# Altium PCB UZ_D_ENDAT.PcbDoc (part 1 of 2)
Units mm, origin at the board's own origin, x right, y up, seen from the top; angles counter-clockwise.
Board outline 155.99 x 100.01 mm, 4 copper layers (Top Layer, GND, VCC, Bottom Layer), stack 0.98 mm thick; 164 components, 121 nets, 547 pads, 92 vias.
Unrouted connection lines stored in the file: 157.
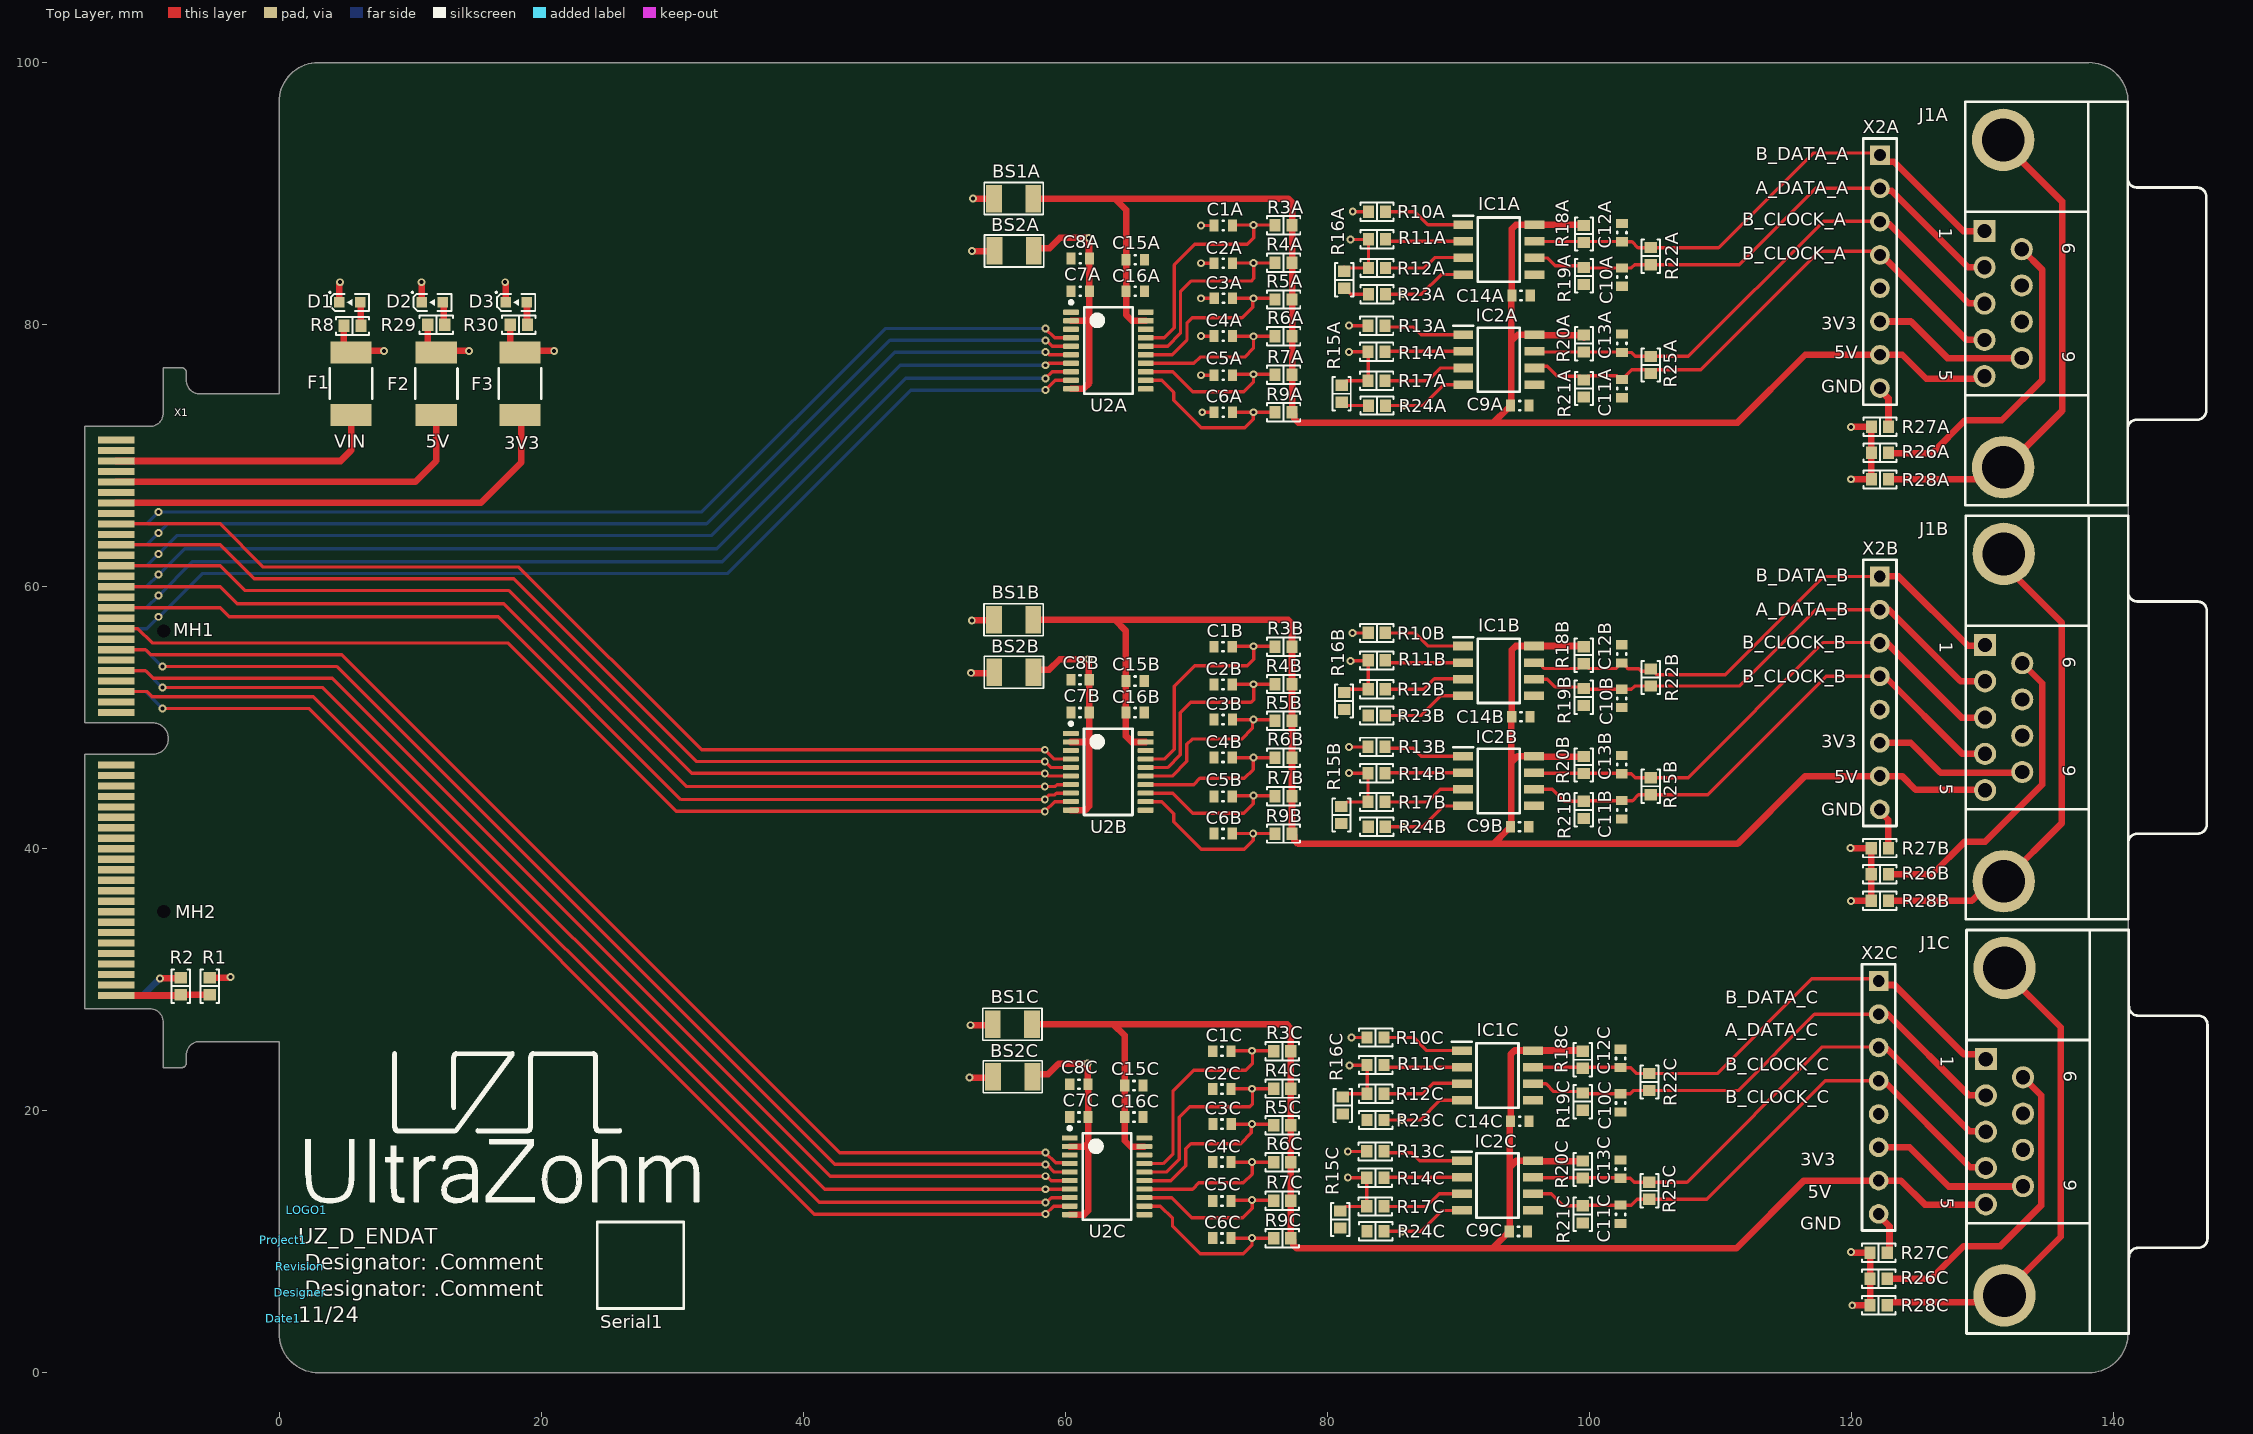
[diagram p0: Top Layer view]
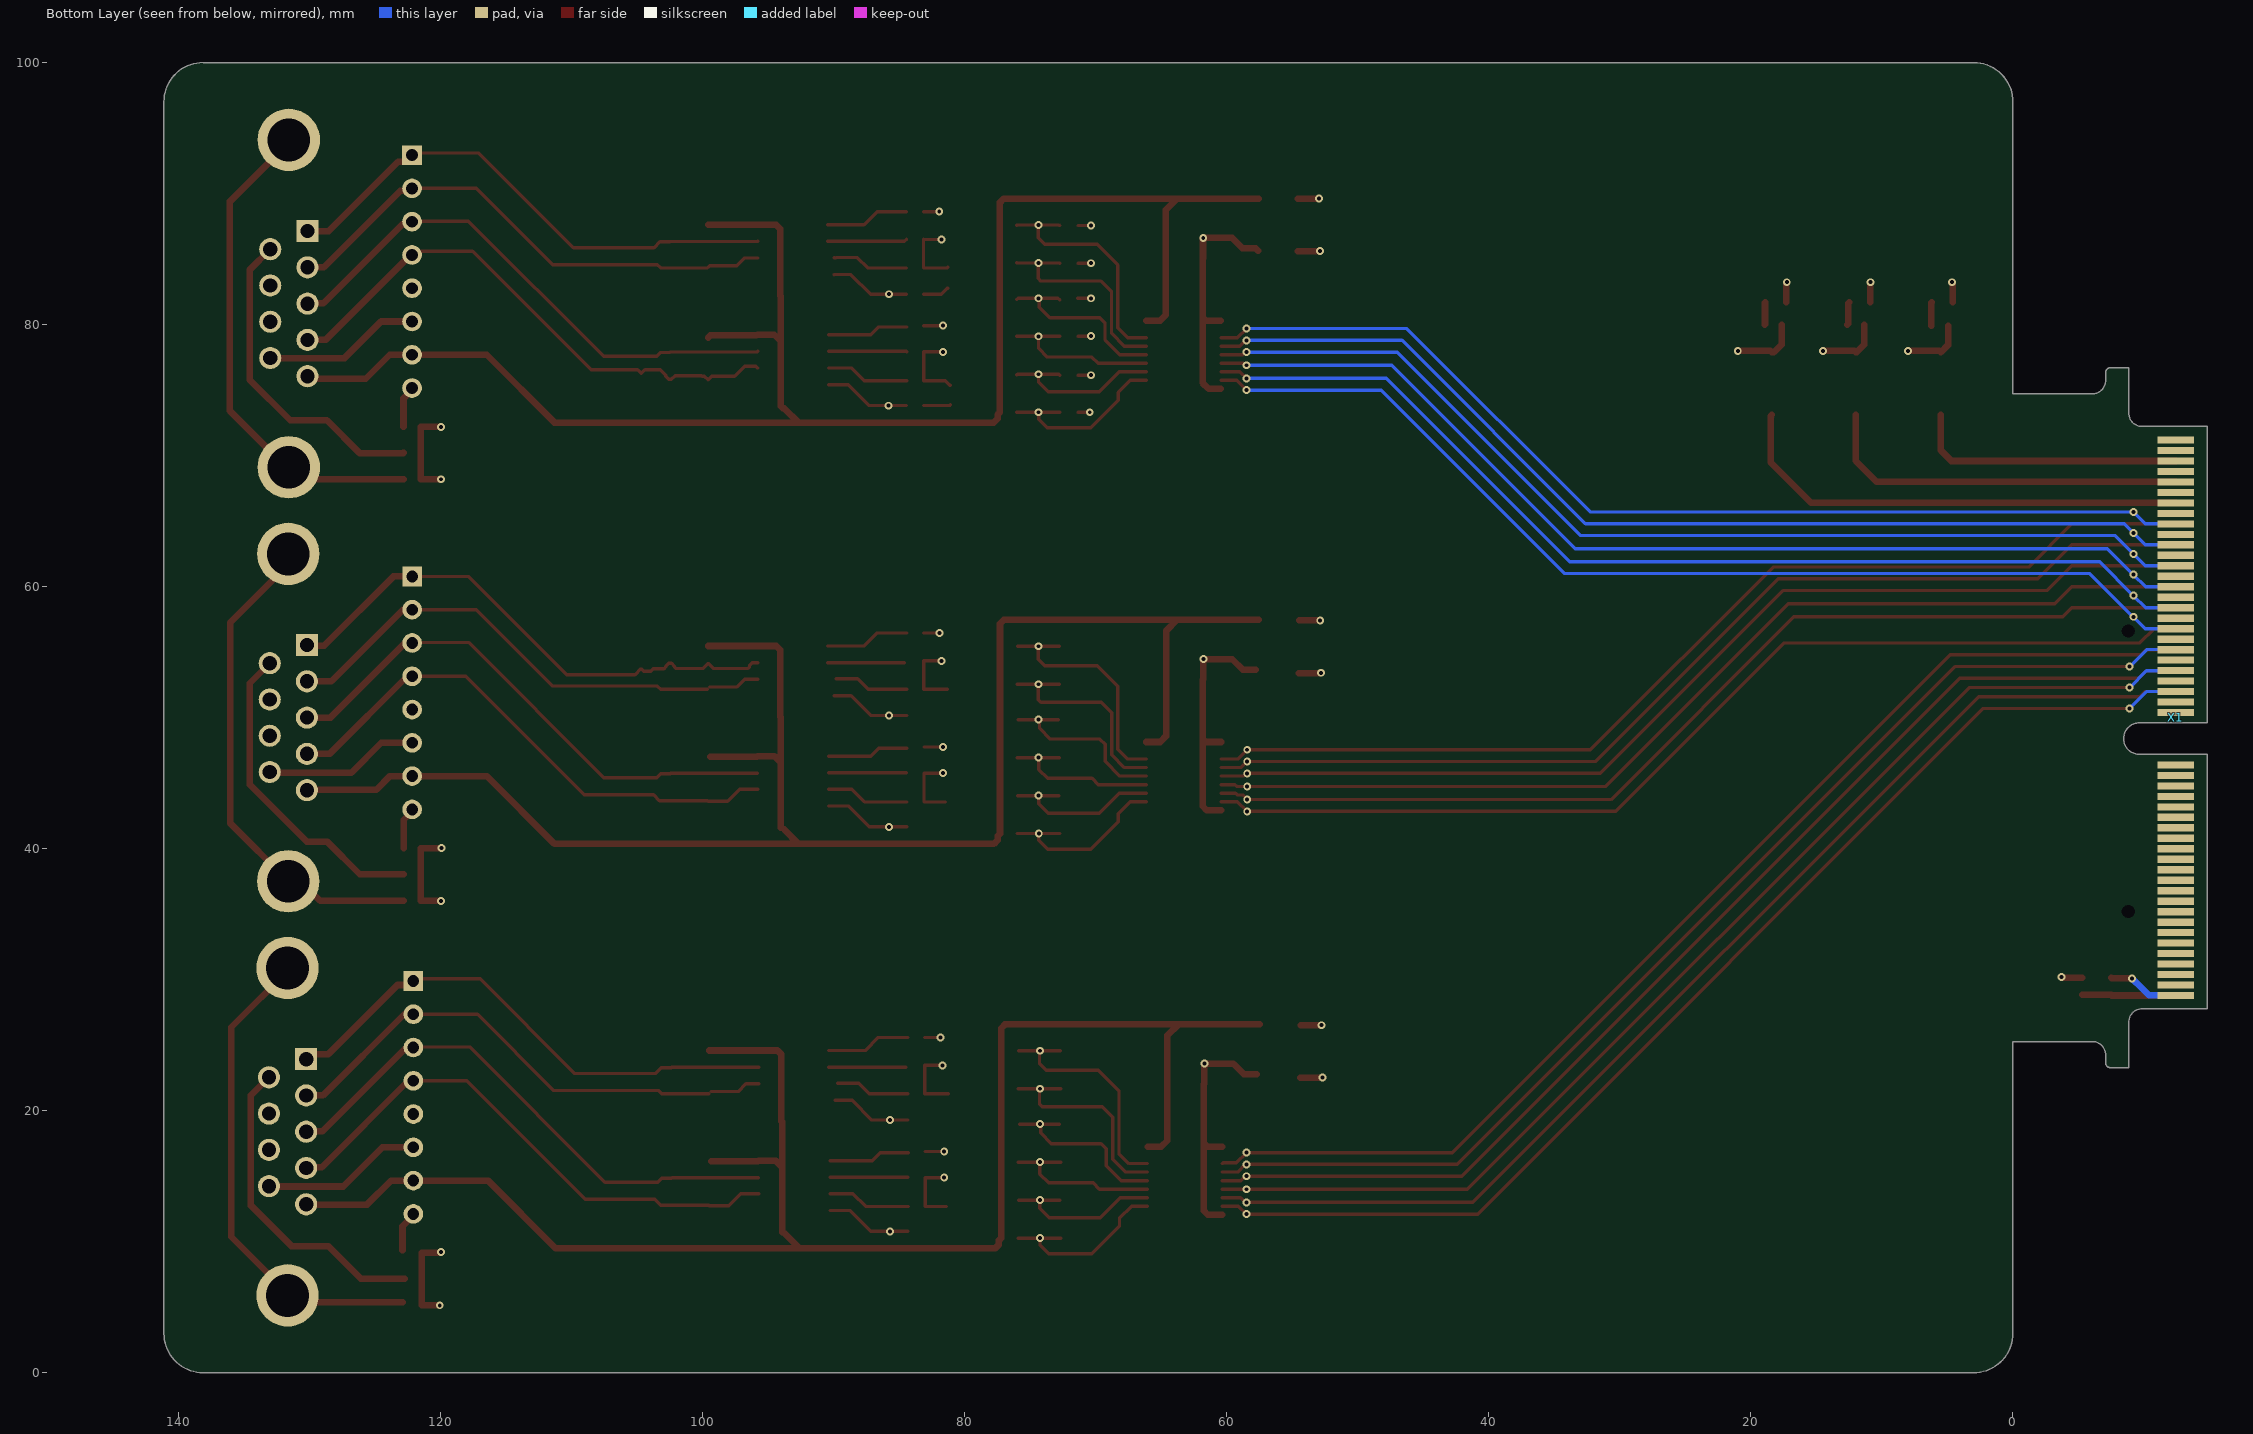
[diagram p1: Bottom Layer view, seen from below]
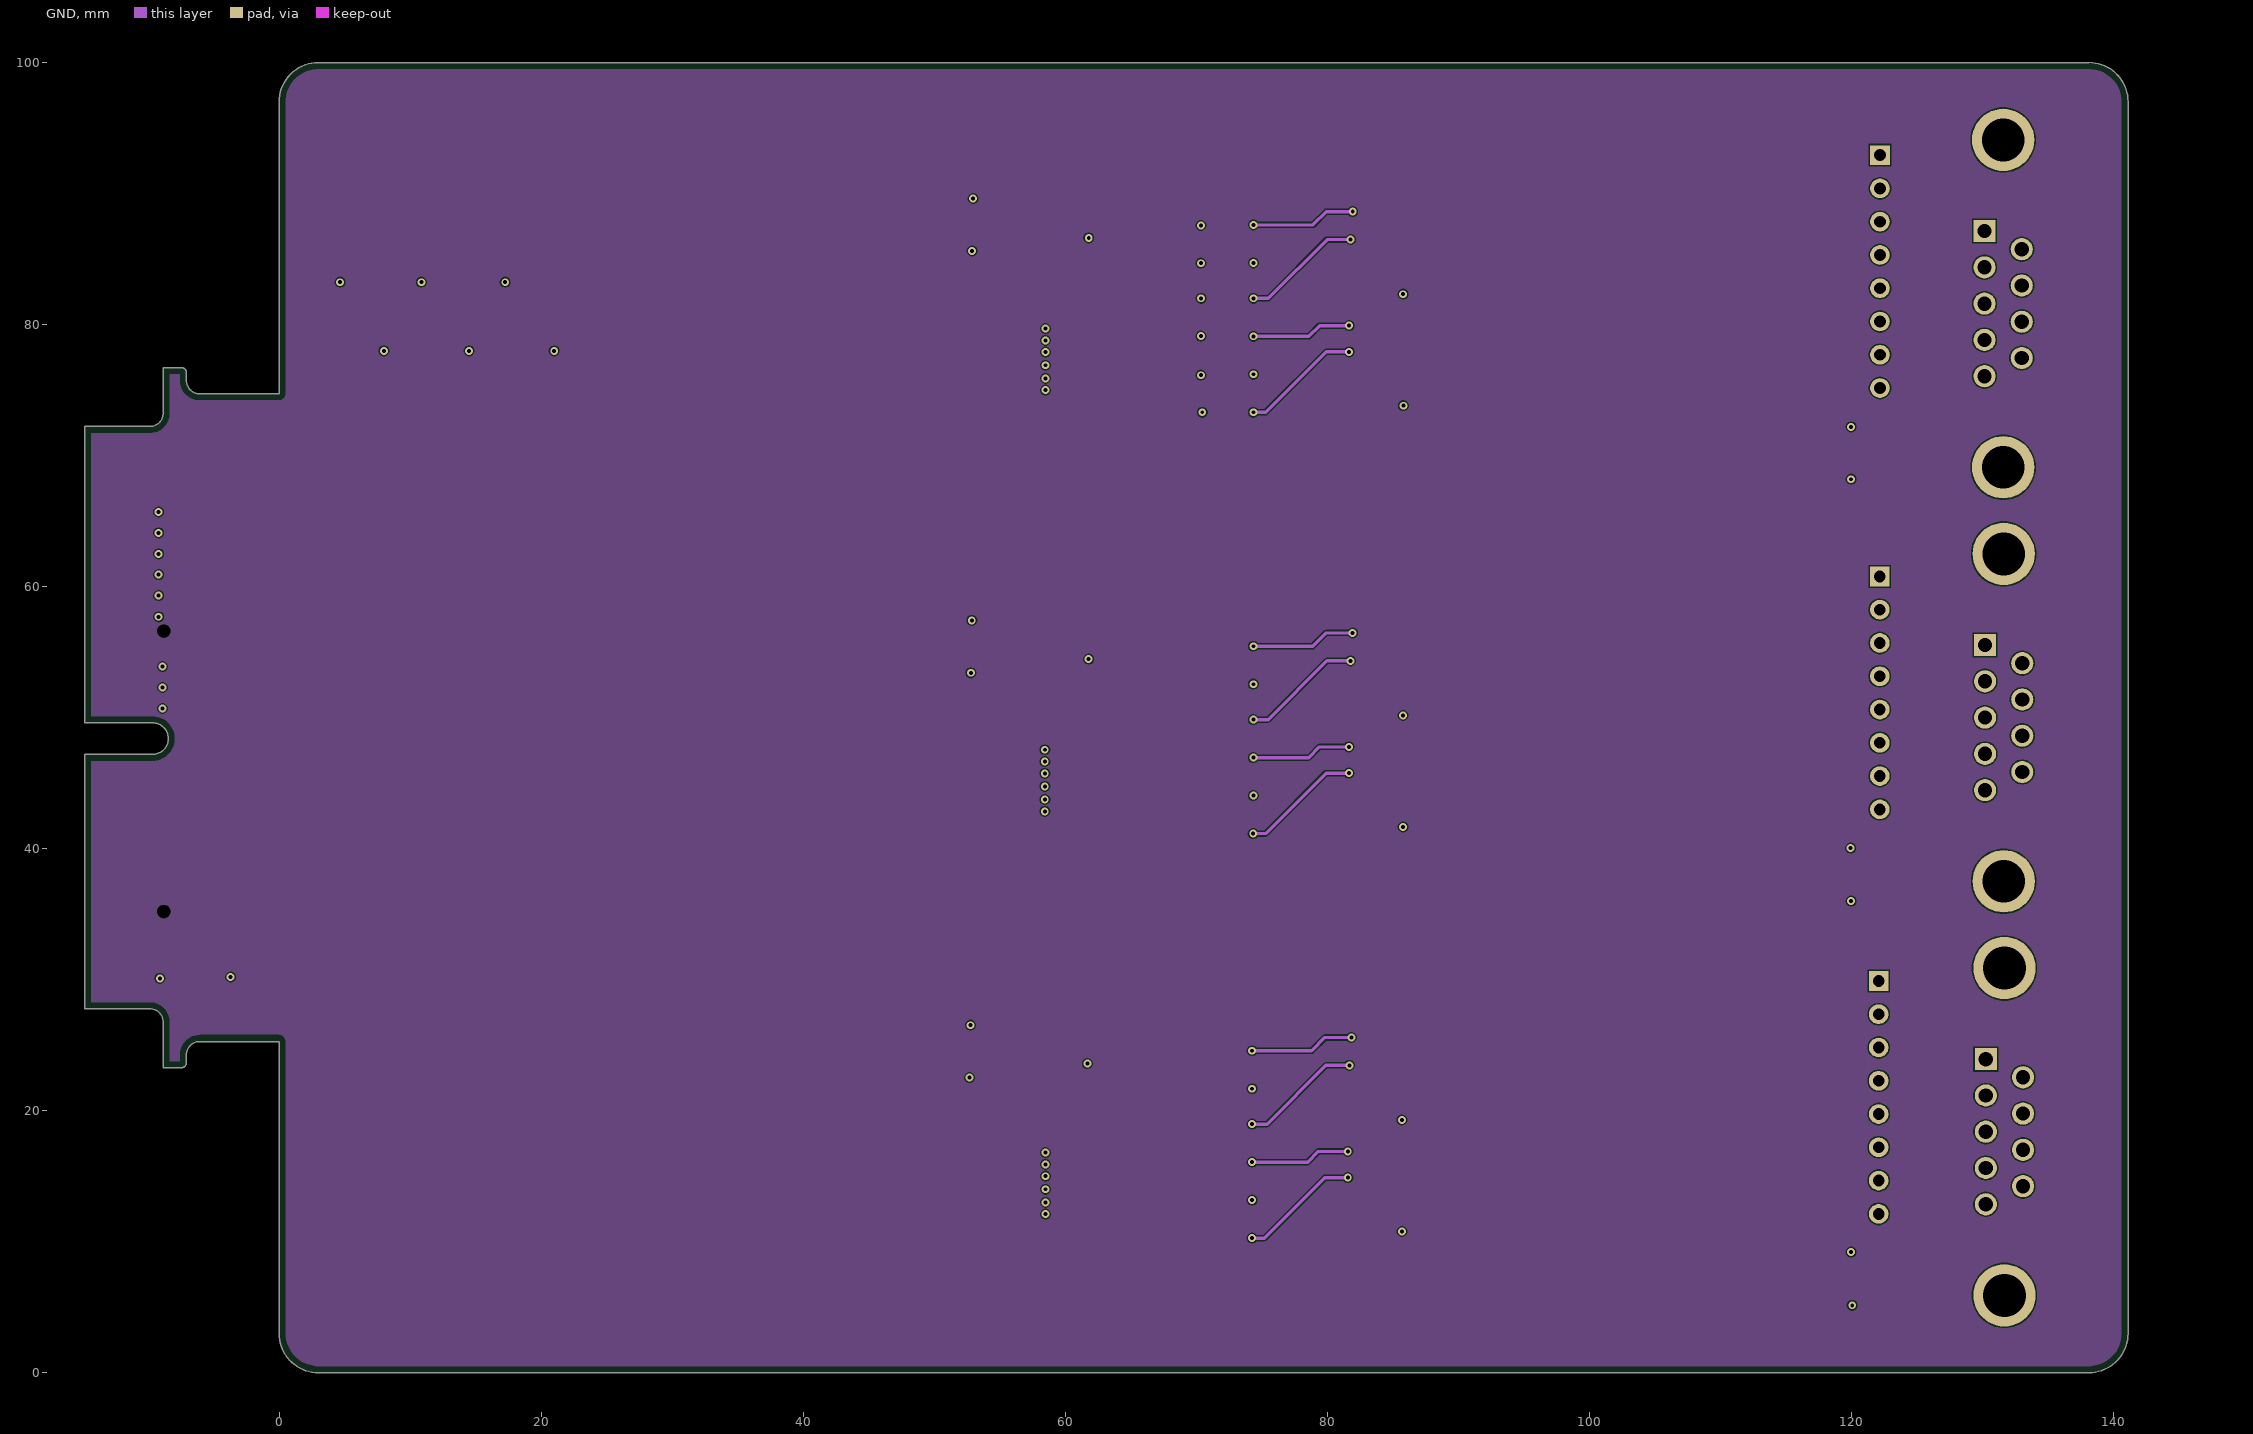
[diagram p2: GND]
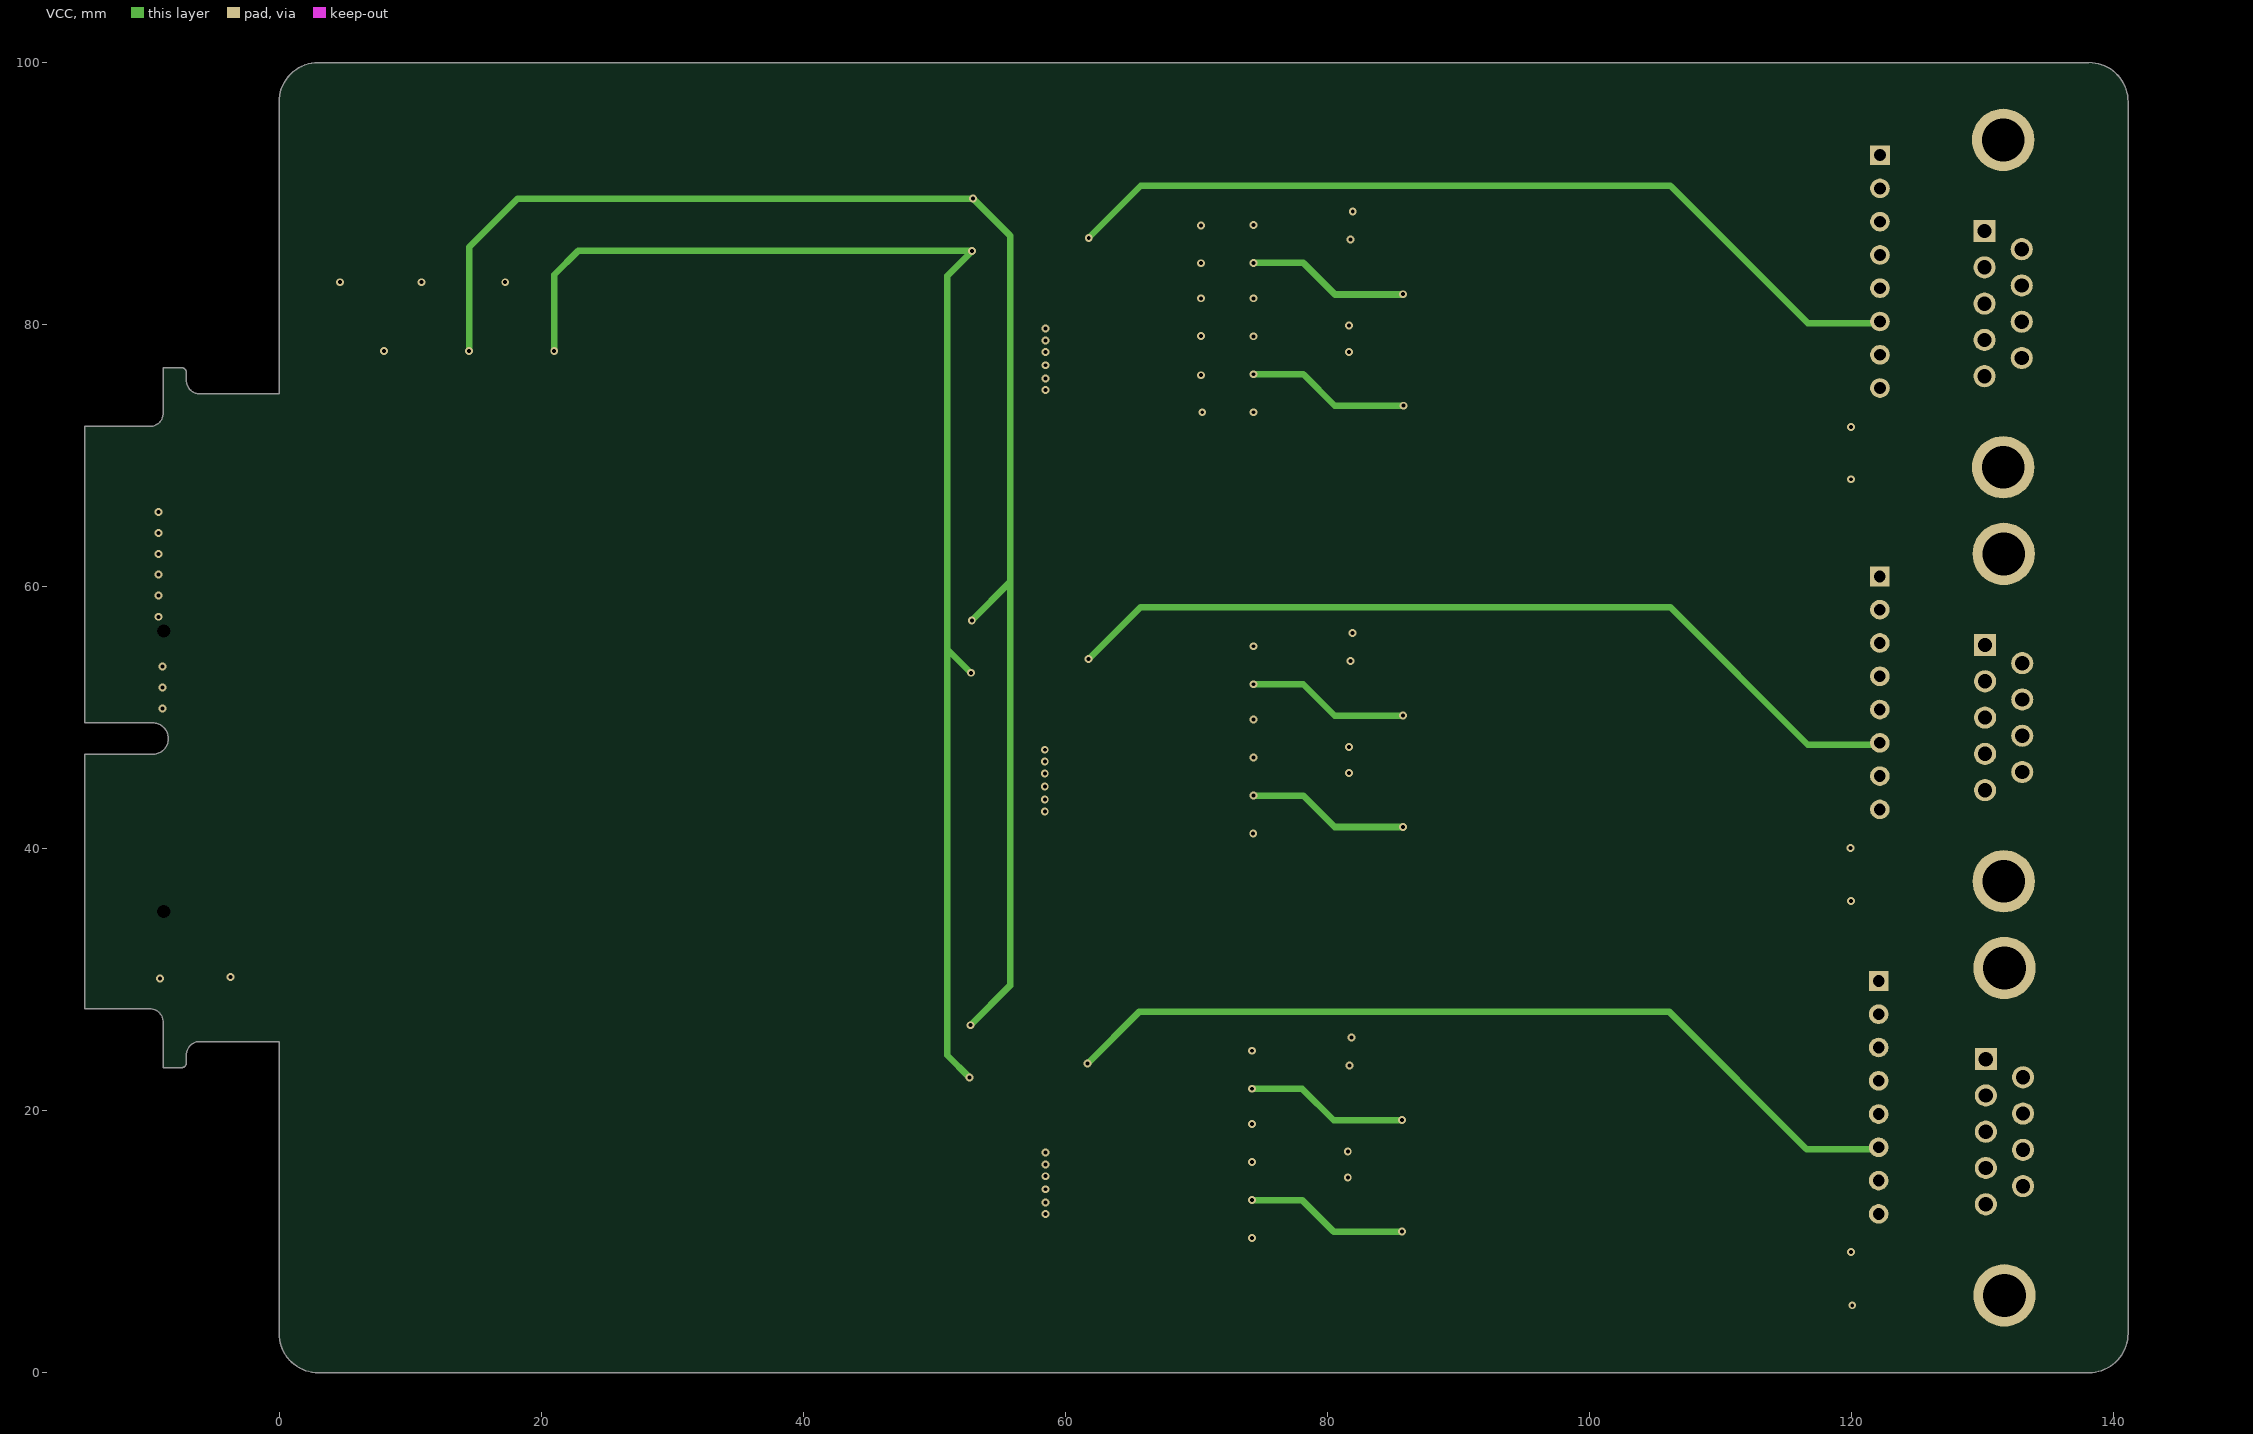
[diagram p3: VCC]
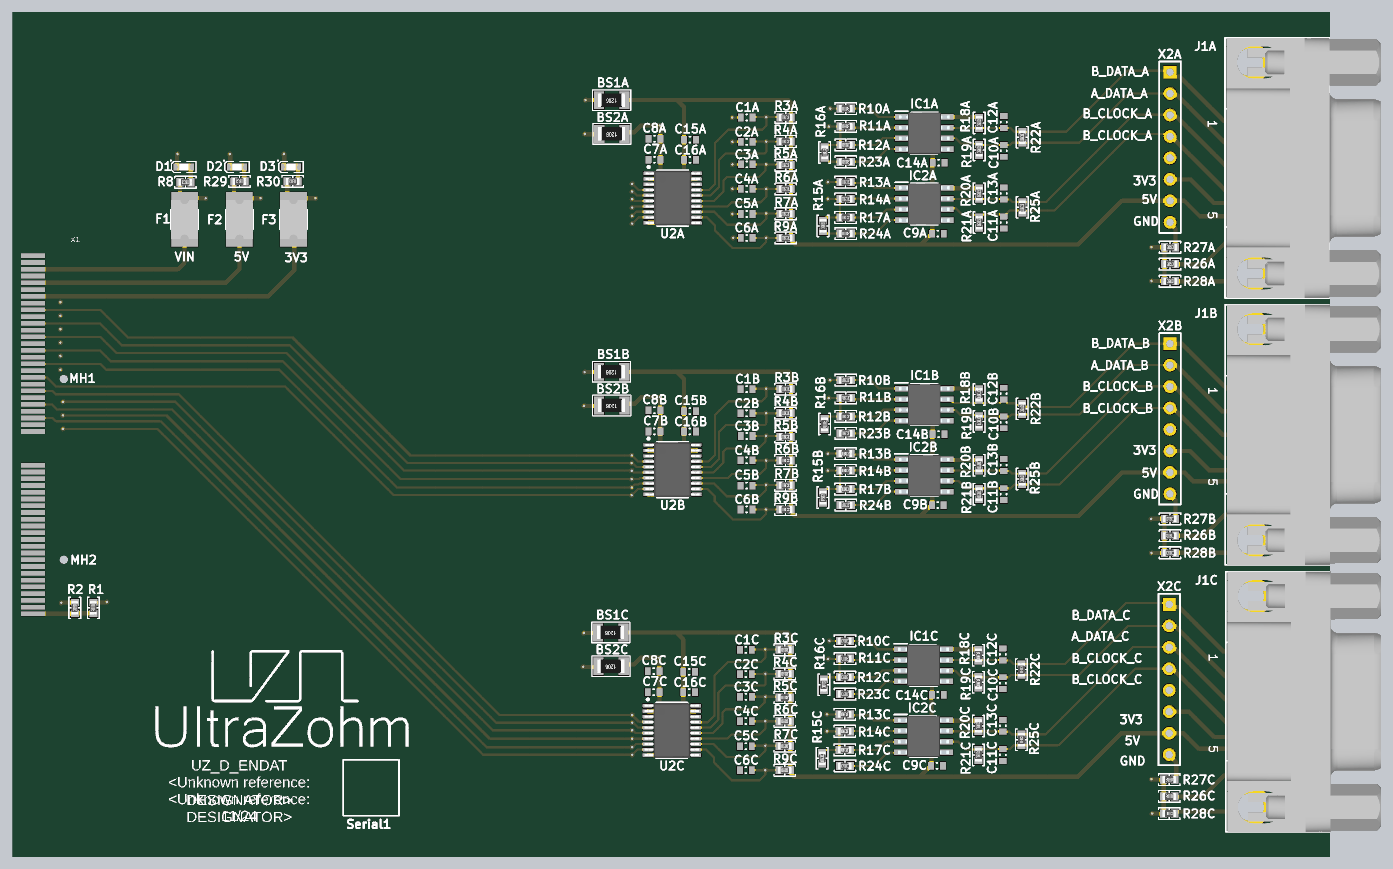
[diagram p5: 3D render of the assembled board from above, using the file's embedded part models]

## Layer stack, top to bottom
Top Solder: solder mask 0.01, Solder Resist, Dk 3.5
Top Layer: signal copper 0.035
Dielectric 2: prepreg 0.115, FR-4, Dk 4.4
Dielectric 4: prepreg 0.115, FR-4, Dk 4.4
GND: signal copper 0.035
Dielectric 1: core 0.38, Core-036, Dk 4.4
VCC: signal copper 0.035
Dielectric 5: prepreg 0.115, FR-4, Dk 4.4
Dielectric 3: prepreg 0.115, FR-4, Dk 4.4
Bottom Layer: signal copper 0.035
Bottom Solder: solder mask 0.01, Solder Resist, Dk 3.5

## Board outline
-14.853,27.775 -9.853,27.775 cw(c-9.853,26.775) -8.853,26.775 -8.853,23.275 -7.473,23.275 ccw(c-7.473,23.675) -7.073,23.675 -7.073,24.275 cw(c-6.073,24.275) -6.073,25.275 0,25.275 0,3 ccw(c3,3) 3,0 138.141,0 ccw(c138.141,3) 141.141,3 141.141,97 141.141,97.01 ccw(c138.141,97.01) 138.141,100.01 3,100 ccw(c3,97) 0,97 0,74.725 -6.073,74.725 cw(c-6.073,75.725) -7.073,75.725 -7.073,76.325 ccw(c-7.473,76.325) -7.473,76.725 -8.853,76.725 -8.853,73.225 cw(c-9.853,73.225) -9.853,72.225 -14.853,72.225 -14.853,49.6 -9.653,49.6 cw(c-9.653,48.4) -9.653,47.2 -14.853,47.2

## Design rules (kind name [scope] priority, off if disabled: settings)
AssemblyTestPointUsage [InNetClass('3V3_SingleEnded') or InNetClass('5V_SingleEnded') or InNetClass('15V_SingleEnded') or InNetClass('DifferentialSignals')] p1:
BoardOutlineClearance [All] p1: gap=0.5 ignorepadtopadclearanceinfootprint=FALSE except(0: Arc-SplitContinuation Track-SplitContinuation SMDPad-SplitContinuation THPad-SplitContinuation Via-SplitContinuation Fill-SplitContinuation Poly-SplitContinuation Region-SplitContinuation Text-SplitContinuation)
Clearance Clearance_Differential [InNetClass('DifferentialSignals')] p1: gap=0.1 ignorepadtopadclearanceinfootprint=TRUE except(0: Arc-Hole Track-Hole SMDPad-Hole THPad-Hole Via-Hole Fill-Hole Poly-Hole Region-Hole Text-Hole; 0.3: SMDPad-Via; 0.4: THPad-Via)
Clearance Clearance_Power [InNetClass('Power')] p2: gap=0.1 ignorepadtopadclearanceinfootprint=TRUE except(0: Arc-Hole Track-Hole SMDPad-Hole THPad-Hole Via-Hole Fill-Hole Poly-Hole Region-Hole Text-Hole; 0.15: Via-Poly; 0.2: Track-Poly; 0.25: THPad-Poly; 0.3: Fill-Poly Poly-Region; 0.5: Poly-Poly)
Clearance [All] p3: gap=0.1 ignorepadtopadclearanceinfootprint=TRUE except(0: Arc-Hole Track-Hole SMDPad-Hole THPad-Hole Via-Hole Fill-Hole Poly-Hole Region-Hole Text-Hole; 0.4: SMDPad-Via THPad-Via; 0.5: Poly-Poly)
ComponentClearance [All] p1: gap=0.1 collisioncheckmode=3 verticalgap=0.1 showdistances=FALSE
DiffPairsRouting [InNetClass('DifferentialSignals')] p1: maxlimit=0.25 minlimit=0.127 mostfreqgap=0.241 toplayer_maxgap=0.127 toplayer_prefgap=0.127 toplayer_minwidth=0.285 toplayer_maxwidth=0.285 toplayer_prefwidth=0.293 midlayer1_minwidth=0.069 midlayer1_maxwidth=0.15 midlayer1_prefwidth=0.15 midlayer2_mingap=0.165 midlayer2_minwidth=0.1 midlayer2_maxwidth=0.15 midlayer2_prefwidth=0.15 bottomlayer_maxgap=0.127 bottomlayer_prefgap=0.127 bottomlayer_minwidth=0.285 bottomlayer_maxwidth=0.285 bottomlayer_prefwidth=0.293 impedanceprofiledriven=TRUE impedanceprofileid={5F7DE71B-7B0B-4CDE-8AE7-8AD61221F3A5} impedanceprofilevalue=100.000000 maxuncoupledlength=12.7
FanoutControl Fanout_Power [InNetClass('Power') or InNet('ENABLE')] p1: bgadir=Out bgaviamode=Centered fanoutstyle=Auto fanoutdirection=None viagrid=0.025
FanoutControl Fanout_RS422 [InNetClass('DifferentialSignals')] p2: bgadir=Out bgaviamode=Closest fanoutstyle=Rows fanoutdirection=OutOnly viagrid=0.025
FanoutControl Fanout_BGA [IsBGA] p3 off: bgadir=Out bgaviamode=Centered fanoutstyle=Auto fanoutdirection=Alternating viagrid=0.025 // Fanout_BGA (Default Rule)
FanoutControl Fanout_LCC [IsLCC] p4 off: bgadir=Out bgaviamode=Centered fanoutstyle=Auto fanoutdirection=Alternating viagrid=0.025 // Fanout_LCC (Default Rule)
FanoutControl Fanout_SOIC [IsSOIC] p5 off: bgadir=Out bgaviamode=Centered fanoutstyle=Auto fanoutdirection=Alternating viagrid=0.025 // Fanout_SOIC (Default Rule)
FanoutControl Fanout_Small [(CompPinCount < 5)] p6 off: bgadir=Out bgaviamode=Centered fanoutstyle=Auto fanoutdirection=OutThenIn viagrid=0.025 // Fanout_Small (Default Rule)
FanoutControl Fanout_Default [All] p7: bgadir=NE bgaviamode=Closest fanoutstyle=Rows fanoutdirection=InOnly viagrid=0.025 // Fanout_Default (Default Rule)
Height [All] p1: minheight=0 maxheight=50 prefheight=12.7
HoleSize [All] p1: absolutevalues=TRUE maxlimit=4 minlimit=0.025 maxpercent=80.000 minpercent=20.000
PolygonConnect PolygonConnect_Therm [HoleSize > 2.6] p1: connectstyle=Direct reliefconductorwidth=0.254 reliefentries=4 polygonreliefangle="90 Angle" airgapwidth=0.254
PolygonConnect PolygonConnect_via [InPadClass('pad') or IsVia] p2: connectstyle=Direct reliefconductorwidth=0.254 reliefentries=4 polygonreliefangle="90 Angle" airgapwidth=0.254
PolygonConnect [All] p3: connectstyle=Relief reliefconductorwidth=0.3 reliefentries=4 polygonreliefangle="90 Angle" airgapwidth=0.25
RoomDefinition Component_LowerEdgeKeepOut [All] p1: confinementstyle=ConfineOut formatcopy=TRUE lockcomponents=FALSE outline 0,0 142,0 142,3 0,3
RoomDefinition Component_UpperEdgeKeepOut [All] p2: confinementstyle=ConfineOut formatcopy=TRUE lockcomponents=FALSE outline 0,97 142,97 142,100 0,100
RoutingLayers RoutingLayers_3V3Signals [InNetClass('3V3_SingleEnded')] p1 off: top layer_v5=TRUE mid layer 1_v5=TRUE mid layer 2_v5=TRUE bottom layer_v5=TRUE
RoutingLayers RoutingLayers_SingleEnded [InNetClass('15V_SingleEnded') or InNetClass('3V3_SingleEnded') or InNetClass('5V_SingleEnded')] p2 off: top layer_v5=TRUE mid layer 1_v5=TRUE mid layer 2_v5=TRUE bottom layer_v5=TRUE
RoutingLayers RoutingLayers_Differential [InNetClass('DifferentialSignals')] p3 off: top layer_v5=TRUE mid layer 1_v5=TRUE mid layer 2_v5=TRUE bottom layer_v5=FALSE
RoutingLayers [All] p4: top layer_v5=TRUE mid layer 1_v5=TRUE mid layer 2_v5=TRUE bottom layer_v5=TRUE
RoutingVias [All] p1: holewidth=0.3 width=0.5 viastyle="Through Hole" minholewidth=0.2 minwidth=0.4 maxholewidth=0.5 maxwidth=1
SolderMaskExpansion [All] p1: expansion=0.102 istentingtop=FALSE
SupplyNets "Schematic Supply Nets_6" [InNet('3V3_PER_fused')] p1: voltage=0.000
SupplyNets "Schematic Supply Nets_5" [InNet('5V_PER_fused')] p2: voltage=0.000
SupplyNets "Schematic Supply Nets_4" [InNet('VIN_unfused')] p3: voltage=0.000
SupplyNets "Schematic Supply Nets_3" [InNet('GND')] p4: voltage=0.000
SupplyNets "Schematic Supply Nets_2" [InNet('VIN_fused')] p5: voltage=0.000
SupplyNets "Schematic Supply Nets_1" [InNet('5V_PER')] p6: voltage=0.000
SupplyNets "Schematic Supply Nets" [InNet('3V3_PER')] p7: voltage=0.000
UnRoutedNet UnRoutedNet_Signals [InNetClass('15V_SingleEnded') or InNetClass('3V3_SingleEnded') or InNetClass('5V_SingleEnded') or InNetClass('DifferentialSignals')] p1: checkbadconnections=TRUE
UnRoutedNet [All] p2: checkbadconnections=TRUE
Width Width_Power [InNetClass('Power')] p1: maxlimit=10 minlimit=0.2 preferedwidth=0.3 minimp=50.000000 maximp=50.000000 favimp=50.000000
Width [All] p2: maxlimit=10 minlimit=0.1 preferedwidth=0.3 midlayer1_prefwidth=0.15 midlayer2_prefwidth=0.15 minimp=50.000000 maximp=50.000000 favimp=50.000000
18 further rules are at their usual default settings.

## Classes and differential pairs
channel class Encoder_Interface: encoderA encoderB encoderC
net class TX-S_DATA_SH[1..3]: DIG_IO_2 DIG_IO_3 DIG_IO_13
net class TX-S_CLOCK_SH[1..3]: DIG_IO_8 DIG_IO_9 DIG_IO_16
net class RX-S_DATA_SH[1..3]: DIG_IO_0 DIG_IO_1 DIG_IO_12
net class RX-S_CLOCK_SH[1..3]: DIG_IO_6 DIG_IO_7 DIG_IO_15
net class READ_WRITE_DATA_SH[1..3]: DIG_IO_4 DIG_IO_5 DIG_IO_14
net class READ_WRITE_CLOCK_SH[1..3]: DIG_IO_10 DIG_IO_11 DIG_IO_17
net class DIG_IO_[0..29]: DIG_IO_0 DIG_IO_1 DIG_IO_2 DIG_IO_3 DIG_IO_4 DIG_IO_5 DIG_IO_6 DIG_IO_7 DIG_IO_8 DIG_IO_9 DIG_IO_10 DIG_IO_11 DIG_IO_12 DIG_IO_13 DIG_IO_14 DIG_IO_15 DIG_IO_16 DIG_IO_17 DIG_IO_18 DIG_IO_19 DIG_IO_20 DIG_IO_21 DIG_IO_22 DIG_IO_23 DIG_IO_24 DIG_IO_25 DIG_IO_26 DIG_IO_27 DIG_IO_28 DIG_IO_29
component class encoderC: BS1C BS2C C1C C2C C3C C4C C5C C6C C7C C8C C9C C10C C11C C12C C13C C14C C15C C16C IC1C IC2C J1C R3C R4C R5C R6C R7C R9C R10C R11C R12C R13C R14C R15C R16C R17C R18C R19C R20C R21C R22C R23C R24C R25C R26C R27C R28C U2C X2C
component class encoderB: BS1B BS2B C1B C2B C3B C4B C5B C6B C7B C8B C9B C10B C11B C12B C13B C14B C15B C16B IC1B IC2B J1B R3B R4B R5B R6B R7B R9B R10B R11B R12B R13B R14B R15B R16B R17B R18B R19B R20B R21B R22B R23B R24B R25B R26B R27B R28B U2B X2B
component class encoderA: BS1A BS2A C1A C2A C3A C4A C5A C6A C7A C8A C9A C10A C11A C12A C13A C14A C15A C16A IC1A IC2A J1A R3A R4A R5A R6A R7A R9A R10A R11A R12A R13A R14A R15A R16A R17A R18A R19A R20A R21A R22A R23A R24A R25A R26A R27A R28A U2A X2A
component class CarrierConnector: D1 D2 D3 F1 F2 F3 R1 R2 R8 R29 R30 X1

## Components (designator, comment, footprint, x,y, rotation, side; value= is the part's Value field where it differs from the comment)
BS1A "HI1206T500R-10" RES_1206 57.576,89.625 r90 top (schematic designator BS1)
BS1B "HI1206T500R-10" RES_1206 57.564,57.465 r90 top (schematic designator BS1)
BS1C "HI1206T500R-10" RES_1206 57.476,26.588 r90 top (schematic designator BS1)
BS2A "HI1206T500R-10" RES_1206 57.603,85.625 r90 top (schematic designator BS2)
BS2B "HI1206T500R-10" RES_1206 57.591,53.466 r90 top (schematic designator BS2)
BS2C "HI1206T500R-10" RES_1206 57.503,22.588 r90 top (schematic designator BS2)
C1A "1 nF" C_0603 72.068,87.567 r0 top (schematic designator C1)
C1B "1 nF" C_0603 72.057,55.407 r0 top (schematic designator C1)
C1C "1 nF" C_0603 71.968,24.53 r0 top (schematic designator C1)
C2A "1 nF" C_0603 72.068,84.689 r0 top (schematic designator C2)
C2B "1 nF" C_0603 72.057,52.53 r0 top (schematic designator C2)
C2C "1 nF" C_0603 71.968,21.652 r0 top (schematic designator C2)
C3A "1 nF" C_0603 72.078,82.011 r0 top (schematic designator C3)
C3B "1 nF" C_0603 72.066,49.851 r0 top (schematic designator C3)
C3C "1 nF" C_0603 71.978,18.974 r0 top (schematic designator C3)
C4A "1 nF" C_0603 72.068,79.126 r0 top (schematic designator C4)
C4B "1 nF" C_0603 72.057,46.966 r0 top (schematic designator C4)
C4C "1 nF" C_0603 71.968,16.089 r0 top (schematic designator C4)
C5A "1 nF" C_0603 72.068,76.141 r0 top (schematic designator C5)
C5B "1 nF" C_0603 72.057,43.981 r0 top (schematic designator C5)
C5C "1 nF" C_0603 71.968,13.104 r0 top (schematic designator C5)
C6A "1 nF" C_0603 72.068,73.311 r0 top (schematic designator C6)
C6B "1 nF" C_0603 72.057,41.151 r0 top (schematic designator C6)
C6C "1 nF" C_0603 71.968,10.274 r0 top (schematic designator C6)
C7A "100 nF" C_0603 61.153,82.55 r0 top (schematic designator C7)
C7B "100 nF" C_0603 61.141,50.391 r0 top (schematic designator C7)
C7C "100 nF" C_0603 61.053,19.513 r0 top (schematic designator C7)
C8A "100 nF" C_0603 61.153,85.05 r0 top (schematic designator C8)
C8B "100 nF" C_0603 61.141,52.891 r0 top (schematic designator C8)
C8C "100 nF" C_0603 61.053,22.013 r0 top (schematic designator C8)
C9A "100 nF" C_0603 94.703,73.825 r180 top (schematic designator C9)
C9B "100 nF" C_0603 94.691,41.666 r180 top (schematic designator C9)
C9C "100 nF" C_0603 94.603,10.788 r180 top (schematic designator C9)
C10A "1 nF" C_0603 102.503,83.625 r90 top (schematic designator C10)
C10B "1 nF" C_0603 102.491,51.466 r90 top (schematic designator C10)
C10C "1 nF" C_0603 102.403,20.588 r90 top (schematic designator C10)
C11A "1 nF" C_0603 102.503,75.125 r90 top (schematic designator C11)
C11B "1 nF" C_0603 102.491,42.966 r90 top (schematic designator C11)
C11C "1 nF" C_0603 102.403,12.088 r90 top (schematic designator C11)
C12A "1 nF" C_0603 102.503,87.025 r270 top (schematic designator C12)
C12B "1 nF" C_0603 102.491,54.866 r270 top (schematic designator C12)
C12C "1 nF" C_0603 102.403,23.988 r270 top (schematic designator C12)
C13A "1 nF" C_0603 102.503,78.575 r270 top (schematic designator C13)
C13B "1 nF" C_0603 102.491,46.416 r270 top (schematic designator C13)
C13C "1 nF" C_0603 102.403,15.538 r270 top (schematic designator C13)
C14A "100 nF" C_0603 94.803,82.225 r180 top (schematic designator C14)
C14B "100 nF" C_0603 94.791,50.066 r180 top (schematic designator C14)
C14C "100 nF" C_0603 94.703,19.188 r180 top (schematic designator C14)
C15A "100 nF" C_0603 65.353,84.95 r180 top (schematic designator C15)
C15B "100 nF" C_0603 65.341,52.791 r180 top (schematic designator C15)
C15C "100 nF" C_0603 65.253,21.913 r180 top (schematic designator C15)
C16A "100 nF" C_0603 65.353,82.55 r180 top (schematic designator C16)
C16B "100 nF" C_0603 65.341,50.391 r180 top (schematic designator C16)
C16C "100 nF" C_0603 65.253,19.513 r180 top (schematic designator C16)
D1 "150060BS84000" WL-SMCW_0603 5.4,81.7 r0 top
D2 "KT-0603R" WL-SMCW_0603 11.7,81.7 r0 top
D3 "19-217/GHC-YR1S2/3T" WL-SMCW_0603 18.1,81.7 r0 top
Date1 "11/24" COMMENT 0.33,4.1 r0 top
Designer "T. Gaupp" Designator:comment 1.6,6.1 r0 top (schematic designator Designer1)
F1 "Littelfuse_PTC_1812" 1812_PTC_Polyfuse_Littelfuse 5.5,75.5 r90 top value="PTC, 1.1 A, 24V"
F2 "Littelfuse_PTC_1812" 1812_PTC_Polyfuse_Littelfuse 12,75.5 r90 top value="PTC, 1.1 A, 24V"
F3 "Littelfuse_PTC_1812" 1812_PTC_Polyfuse_Littelfuse 18.4,75.5 r90 top value="PTC, 1.1 A, 24V"
IC1A "THVD1450D" SOIC127P600X175-8N 93.103,85.725 r0 top (schematic designator IC1)
IC1B "THVD1450D" SOIC127P600X175-8N 93.091,53.566 r0 top (schematic designator IC1)
IC1C "THVD1450D" SOIC127P600X175-8N 93.003,22.688 r0 top (schematic designator IC1)
IC2A "THVD1450D" SOIC127P600X175-8N 93.103,77.325 r0 top (schematic designator IC2)
IC2B "THVD1450D" SOIC127P600X175-8N 93.091,45.166 r0 top (schematic designator IC2)
IC2C "THVD1450D" SOIC127P600X175-8N 93.003,14.288 r0 top (schematic designator IC2)
J1A "DSUB1.385-2H9" DSUB1.385-2H9 141.1,81.605 r270 top (schematic designator J1)
J1B "DSUB1.385-2H9" DSUB1.385-2H9 141.141,50.005 r270 top (schematic designator J1)
J1C "DSUB1.385-2H9" DSUB1.385-2H9 141.2,18.395 r270 top (schematic designator J1)
LOGO1 "UZ Logo" UZ_Logo_small 2.1,12.4 r0 top
MH1 "alignment hole 1mm" MH_1#1 -17.521,60.447 r90 top
MH2 "alignment hole 1mm" MH_1#2 -12.221,60.447 r90 top
Project1 "UZ_D_ENDAT" COMMENT 0.33,10.1 r0 top
R1 "0R" "RES 0603_1608" -5.3,29.5 r270 top
R2 "0R" "RES 0603_1608" -7.5,29.5 r270 top
R3A "1k" "RES 0603_1608" 76.678,87.578 r0 top (schematic designator R3)
R3B "1k" "RES 0603_1608" 76.666,55.419 r0 top (schematic designator R3)
R3C "1k" "RES 0603_1608" 76.578,24.541 r0 top (schematic designator R3)
R4A "1k" "RES 0603_1608" 76.678,84.725 r0 top (schematic designator R4)
R4B "1k" "RES 0603_1608" 76.666,52.566 r0 top (schematic designator R4)
R4C "1k" "RES 0603_1608" 76.578,21.688 r0 top (schematic designator R4)
R5A "1k" "RES 0603_1608" 76.678,81.919 r0 top (schematic designator R5)
R5B "1k" "RES 0603_1608" 76.666,49.76 r0 top (schematic designator R5)
R5C "1k" "RES 0603_1608" 76.578,18.882 r0 top (schematic designator R5)
R6A "1k" "RES 0603_1608" 76.678,79.111 r0 top (schematic designator R6)
R6B "1k" "RES 0603_1608" 76.666,46.951 r0 top (schematic designator R6)
R6C "1k" "RES 0603_1608" 76.578,16.074 r0 top (schematic designator R6)
R7A "1k" "RES 0603_1608" 76.678,76.168 r0 top (schematic designator R7)
R7B "1k" "RES 0603_1608" 76.666,44.009 r0 top (schematic designator R7)
R7C "1k" "RES 0603_1608" 76.578,13.131 r0 top (schematic designator R7)
R8 "24k9" "RES 0603_1608" 5.6,79.9 r180 top
R9A "1k" "RES 0603_1608" 76.678,73.311 r0 top (schematic designator R9)
R9B "1k" "RES 0603_1608" 76.666,41.151 r0 top (schematic designator R9)
R9C "1k" "RES 0603_1608" 76.578,10.274 r0 top (schematic designator R9)
R10A "0R" "RES 0603_1608" 83.803,88.625 r0 top (schematic designator R10)
R10B "0R" "RES 0603_1608" 83.791,56.466 r0 top (schematic designator R10)
R10C "0R" "RES 0603_1608" 83.703,25.588 r0 top (schematic designator R10)
R11A "0R" "RES 0603_1608" 83.803,86.525 r0 top (schematic designator R11)
R11B "0R" "RES 0603_1608" 83.791,54.366 r0 top (schematic designator R11)
R11C "0R" "RES 0603_1608" 83.703,23.488 r0 top (schematic designator R11)
R12A "0R" "RES 0603_1608" 83.803,84.325 r0 top (schematic designator R12)
R12B "0R" "RES 0603_1608" 83.791,52.166 r0 top (schematic designator R12)
R12C "0R" "RES 0603_1608" 83.703,21.288 r0 top (schematic designator R12)
R13A "0R" "RES 0603_1608" 83.778,79.925 r0 top (schematic designator R13)
R13B "0R" "RES 0603_1608" 83.766,47.766 r0 top (schematic designator R13)
R13C "0R" "RES 0603_1608" 83.678,16.888 r0 top (schematic designator R13)
R14A "0R" "RES 0603_1608" 83.778,77.925 r0 top (schematic designator R14)
R14B "0R" "RES 0603_1608" 83.766,45.766 r0 top (schematic designator R14)
R14C "0R" "RES 0603_1608" 83.678,14.888 r0 top (schematic designator R14)
R15A "10k" "RES 0603_1608" 81.103,74.725 r90 top (schematic designator R15)
R15B "10k" "RES 0603_1608" 81.091,42.566 r90 top (schematic designator R15)
R15C "10k" "RES 0603_1608" 81.003,11.688 r90 top (schematic designator R15)
R16A "10k" "RES 0603_1608" 81.303,83.425 r90 top (schematic designator R16)
R16B "10k" "RES 0603_1608" 81.291,51.266 r90 top (schematic designator R16)
R16C "10k" "RES 0603_1608" 81.203,20.388 r90 top (schematic designator R16)
R17A "0R" "RES 0603_1608" 83.778,75.725 r0 top (schematic designator R17)
R17B "0R" "RES 0603_1608" 83.766,43.566 r0 top (schematic designator R17)
R17C "0R" "RES 0603_1608" 83.678,12.688 r0 top (schematic designator R17)
R18A "1k" "RES 0603_1608" 99.603,86.925 r90 top (schematic designator R18)
R18B "1k" "RES 0603_1608" 99.591,54.766 r90 top (schematic designator R18)
R18C "1k" "RES 0603_1608" 99.503,23.888 r90 top (schematic designator R18)
R19A "1k" "RES 0603_1608" 99.603,83.725 r90 top (schematic designator R19)
R19B "1k" "RES 0603_1608" 99.591,51.566 r90 top (schematic designator R19)
R19C "1k" "RES 0603_1608" 99.503,20.688 r90 top (schematic designator R19)
R20A "1k" "RES 0603_1608" 99.603,78.55 r90 top (schematic designator R20)
R20B "1k" "RES 0603_1608" 99.591,46.391 r90 top (schematic designator R20)
R20C "1k" "RES 0603_1608" 99.503,15.513 r90 top (schematic designator R20)
R21A "1k" "RES 0603_1608" 99.603,75.125 r90 top (schematic designator R21)
R21B "1k" "RES 0603_1608" 99.591,42.966 r90 top (schematic designator R21)
R21C "1k" "RES 0603_1608" 99.503,12.088 r90 top (schematic designator R21)
R22A "120R" "RES 0603_1608" 104.703,85.225 r90 top (schematic designator R22)
R22B "120R" "RES 0603_1608" 104.691,53.066 r90 top (schematic designator R22)
R22C "120R" "RES 0603_1608" 104.603,22.188 r90 top (schematic designator R22)
R23A "10k" "RES 0603_1608" 83.803,82.325 r0 top (schematic designator R23)
R23B "10k" "RES 0603_1608" 83.791,50.166 r0 top (schematic designator R23)
R23C "10k" "RES 0603_1608" 83.703,19.288 r0 top (schematic designator R23)
R24A "10k" "RES 0603_1608" 83.803,73.825 r0 top (schematic designator R24)
R24B "10k" "RES 0603_1608" 83.791,41.666 r0 top (schematic designator R24)
R24C "10k" "RES 0603_1608" 83.703,10.788 r0 top (schematic designator R24)
R25A "120R" "RES 0603_1608" 104.703,76.925 r90 top (schematic designator R25)
R25B "120R" "RES 0603_1608" 104.691,44.766 r90 top (schematic designator R25)
R25C "120R" "RES 0603_1608" 104.603,13.888 r90 top (schematic designator R25)
R26A "0R" "RES 0603_1608" 122.2,70.213 r180 top (schematic designator R26)
R26B "0R" "RES 0603_1608" 122.188,38.053 r180 top (schematic designator R26)
R26C "0R" "RES 0603_1608" 122.1,7.176 r180 top (schematic designator R26)
R27A "0R" "RES 0603_1608" 122.2,72.204 r180 top (schematic designator R27)
R27B "0R" "RES 0603_1608" 122.188,40.045 r180 top (schematic designator R27)
R27C "0R" "RES 0603_1608" 122.1,9.167 r180 top (schematic designator R27)
R28A "0R" "RES 0603_1608" 122.2,68.182 r0 top (schematic designator R28)
R28B "0R" "RES 0603_1608" 122.188,36.023 r0 top (schematic designator R28)
R28C "0R" "RES 0603_1608" 122.1,5.145 r0 top (schematic designator R28)
R29 "4k7" "RES 0603_1608" 12,80 r180 top
R30 "2k2" "RES 0603_1608" 18.3,80 r180 top
Revision "Rev01" Designator:comment 1.6,8.1 r0 top (schematic designator Revision1)
Serial1 "Serial #" SERIAL 26.3,10.3 r0 top
U2A "TXB0108PWR" PW0020A_L 63.303,78.025 r0 top (schematic designator U2)
U2B "TXB0108PWR" PW0020A_L 63.291,45.866 r0 top (schematic designator U2)
U2C "TXB0108PWR" PW0020A_L 63.203,14.988 r0 top (schematic designator U2)
X1 "HSEC8-150-01-XX-DV-A-BL-CARD" HSEC8-150-01-XX-DV-A-BL-CARD -14.84,49.991 r270 bottom
X2A "Pin Header" HDR1X8 122.2,92.94 r270 top (schematic designator X2)
X2B "Pin Header" HDR1X8 122.188,60.781 r270 top (schematic designator X2)
X2C "Pin Header" HDR1X8 122.1,29.903 r270 top (schematic designator X2)

## Footprints (in the part's own frame and the unit in brackets; to place one, negate y for a bottom-side part, rotate by r counter-clockwise, add the part's x,y. Pads: shape width x height; smd on the part's side, far side on the other; paste and mask are expansions set on the pad)
1812_PTC_Polyfuse_Littelfuse [mm] "Chip Fuse, 2-Leads, Body 4.6x3.24mm"
  rect 1.68x3.14 smd: 1(-2.39,0) 2(2.39,0)
  silkscreen extent -1.15,-1.62 1.15,1.62, body extent -2.3,-1.62 2.3,1.62, height 1.15
C_0603 [mm] "Chip Capacitor, Body 1.6x0.8mm, Height 1.0mm, IPC High Density"
  rect 0.7x0.9 smd: 1(-0.7,0) 2(0.7,0)
  silkscreen extent -0.05,-0.35 0.05,0.35, body extent -0.87,-0.47 0.88,0.48, height 1
COMMENT [mm] "prints out the comment of a component"
Designator:comment [mm] "prints out designator and comment of a component"
DSUB1.385-2H9 [mm] "Connector; D Subminiature; 9 Position; Right Angle; Pitch 1.385 mm"
  rect 1.69x1.69 hole 1.09: 1(-5.54,-10.92)
  round 1.69 hole 1.09: 2(-2.77,-10.92) 3(0,-10.92) 4(2.77,-10.92) 5(5.54,-10.92) 6(-4.155,-8.08) 7(-1.385,-8.08) 8(1.385,-8.08) 9(4.155,-8.08)
  round 4.76 hole 3.26: 10(-12.495,-9.5) 11(12.495,-9.5)
  silkscreen extent -15.4,-12.4 15.4,6, body extent -15.4,-12.2 15.41,6, height 12.8
HDR1X8 [mm] "Connector; Header; 8 Position"
  rect 1.5x1.5 hole 0.9: 1(0,0)
  round 1.5 hole 0.9: 2(2.54,0) 3(5.08,0) 4(7.62,0) 5(10.16,0) 6(12.7,0) 7(15.24,0) 8(17.78,0)
  silkscreen extent -1.27,-1.27 19.05,1.27
HSEC8-150-01-XX-DV-A-BL-CARD [mm]
  rect 0.55x2.8 smd far side mask+0.05: 1(-21.2,-2.4) 3(-20.4,-2.4) 5(-19.6,-2.4) 7(-18.8,-2.4) 9(-18,-2.4) 11(-17.2,-2.4) 13(-16.4,-2.4) 15(-15.6,-2.4) 17(-14.8,-2.4) 19(-14,-2.4) 21(-13.2,-2.4) 23(-12.4,-2.4) 25(-11.6,-2.4) 27(-10.8,-2.4) 29(-10,-2.4) 31(-9.2,-2.4) 33(-8.4,-2.4) 35(-7.6,-2.4) 37(-6.8,-2.4) 39(-6,-2.4) 41(-5.2,-2.4) 43(-4.4,-2.4) 45(-3.6,-2.4) 47(-2.8,-2.4) 49(-2,-2.4) 51(-1.2,-2.4) 53(-0.4,-2.4) 55(3.6,-2.4) 57(4.4,-2.4) 59(5.2,-2.4) 61(6,-2.4) 63(6.8,-2.4) 65(7.6,-2.4) 67(8.4,-2.4) 69(9.2,-2.4) 71(10,-2.4) 73(10.8,-2.4) 75(11.6,-2.4) 77(12.4,-2.4) 79(13.2,-2.4) 81(14,-2.4) 83(14.8,-2.4) 85(15.6,-2.4) 87(16.4,-2.4) 89(17.2,-2.4) 91(18,-2.4) 93(18.8,-2.4) 95(19.6,-2.4) 97(20.4,-2.4) 99(21.2,-2.4)
  rect 0.55x2.8 smd mask+0.05: 2(-21.2,-2.4) 4(-20.4,-2.4) 6(-19.6,-2.4) 8(-18.8,-2.4) 10(-18,-2.4) 12(-17.2,-2.4) 14(-16.4,-2.4) 16(-15.6,-2.4) 18(-14.8,-2.4) 20(-14,-2.4) 22(-13.2,-2.4) 24(-12.4,-2.4) 26(-11.6,-2.4) 28(-10.8,-2.4) 30(-10,-2.4) 32(-9.2,-2.4) 34(-8.4,-2.4) 36(-7.6,-2.4) 38(-6.8,-2.4) 40(-6,-2.4) 42(-5.2,-2.4) 44(-4.4,-2.4) 46(-3.6,-2.4) 48(-2.8,-2.4) 50(-2,-2.4) 52(-1.2,-2.4) 54(-0.4,-2.4) 56(3.6,-2.4) 58(4.4,-2.4) 60(5.2,-2.4) 62(6,-2.4) 64(6.8,-2.4) 66(7.6,-2.4) 68(8.4,-2.4) 70(9.2,-2.4) 72(10,-2.4) 74(10.8,-2.4) 76(11.6,-2.4) 78(12.4,-2.4) 80(13.2,-2.4) 82(14,-2.4) 84(14.8,-2.4) 86(15.6,-2.4) 88(16.4,-2.4) 90(17.2,-2.4) 92(18,-2.4) 94(18.8,-2.4) 96(19.6,-2.4) 98(20.4,-2.4) 100(21.2,-2.4)
MH_1#1 [mm]
  round 0 hole 1 unplated: 1(-3.847,-8.721)
MH_1#2 [mm]
  round 0 hole 1 unplated: 1(-25.247,-3.421)
PW0020A_L [mm] "SOP, 20-Leads, Body 6.6x4.5mm, Pitch 0.65mm, IPC High Density"
  rrect25% 1.2x0.4 smd: 1(-2.85,2.925) 2(-2.85,2.275) 3(-2.85,1.625) 4(-2.85,0.975) 5(-2.85,0.325) 6(-2.85,-0.325) 7(-2.85,-0.975) 8(-2.85,-1.625) 9(-2.85,-2.275) 10(-2.85,-2.925) 11(2.85,-2.925) 12(2.85,-2.275) 13(2.85,-1.625) 14(2.85,-0.975) 15(2.85,-0.325) 16(2.85,0.325) 17(2.85,0.975) 18(2.85,1.625) 19(2.85,2.275) 20(2.85,2.925)
  silkscreen extent -2.97,-3.3 1.85,3.8, body extent -3.21,-3.25 3.21,3.25, height 1
"RES 0603_1608" [mm] "Chip Resistor, 2-Leads, Body 1.60x0.80mm, IPC Medium Density"
  rect 0.85x0.95 smd: 1(-0.65,0) 2(0.65,0)
  silkscreen extent -1.27,-0.7 1.27,0.7, body extent -0.8,-0.4 0.8,0.4, height 0.45
RES_1206 [mm] "RES 1206"
  rect 2.1x1.2 smd: 1(0,0) 2(0,3)
  silkscreen extent -1.22,-0.76 1.22,3.76, body extent -0.8,-0.08 0.8,3.12, height 0.6
SERIAL [mm]
  silkscreen extent -2,-5.4 4.6,1.2
SOIC127P600X175-8N [mm]
  rect 1.525x0.65 smd: 1(-2.712,1.905) 2(-2.712,0.635) 3(-2.712,-0.635) 4(-2.712,-1.905) 5(2.712,-1.905) 6(2.712,-0.635) 7(2.712,0.635) 8(2.712,1.905)
  silkscreen extent -3.47,-2.45 1.6,2.58, body extent -3,-2.45 3,2.45, height 1.75
UZ_Logo_small [mm] "logo width 3cm"
  silkscreen extent -0.05,0.57 29.94,12.12
WL-SMCW_0603 [mm] "SMD Mono-color Chip LED, body 1.6x0.8mm"
  rect 0.8x0.8 smd: 1(-0.8,0) 2(0.8,0)
  silkscreen extent -1.59,-0.65 1.45,0.83, body extent -0.8,-0.4 0.8,0.4, height 0.7

## Part data
BS1A BS1B BS1C BS2A BS2B BS2C: library part Bead, "Ferrite bead 6A", Package=1206, Supplier Part Number 1=875-HI1206T500R-10, MF=Laird, MFN=HI1206T500R-10, Supplier 1=Mouser, Supplier 2=Digi-Key, Supplier Part Number 2=240-2412-1-ND
C1A C1B C1C C2A C2B C2C C3A C3B C3C C4A C4B C4C C5A C5B C5C C6A C6B C6C C10A C10B C10C C11A C11B C11C C12A C12B C12C C13A C13B C13C: library part 06035A102JAT2A, "Capacitor 0603, 50 VDC, 1 nF, C0G", Device Package=0603, LCSC Part Number=C106246, Manufacturer=AVX, Operating Temperature="-55 - 125°C", Supplier Part Number 1=581-06035A102J, Tolerance="5 %", Voltage Rating="50 VDC", Component Type="Capacitor 0603", ComponentLink1Description=Datasheet, ComponentLink1URL=https://www.mouser.de/datasheet/2/40/C0GNP0_Dielectric-951274.pdf, Created from=MGremer, Created On="20.12.2020 13:54:13", Last Updated="15.02.2023 13:44:24", Live Cycle Status=1, Manufacturer Part Number=06035A102JAT2A, Mounting Type=SMD, PartID=57, Series=C0G, Stock number="not stored", Supplier 1=Mouser, Type=Capacitor
C7A C7B C7C C8A C8B C8C C9A C9B C9C C14A C14B C14C C15A C15B C15C C16A C16B C16C: library part C0603C104K5RAC3121, "Capacitor 0603, 50 VDC, 100nF, X7R", Device Package=0603, LCSC Part Number=C696358, Manufacturer=KEMET, Operating Temperature="-55 - 125°C", Supplier Part Number 1=80-C603C104K5RAC3121, Tolerance="10 %", Voltage Rating="50 VDC", Component Type="Capacitor 0603", ComponentLink1Description=Datasheet, ComponentLink1URL=https://www.mouser.de/datasheet/2/212/KEM_C1023_X7R_AUTO_SMD-1093309.pdf, Created from=DHufnagel, Created On="11.08.2022 14:33:29", Last Updated="19.08.2022 08:26:58", Live Cycle Status=1, Manufacturer Part Number=C0603C104K5RAC3121, Mounting Type=SMD, PartID=99, Series=X7R, Stock number="not stored", Supplier 1=Mouser, Supplier 2=LCSC, Supplier Part Number 2=C696358, Type=Capacitor
D1: "WL-SMCW SMD Mono-color Chip LED Waterclear Blue", Color=blue, Device Package=0603, Forward Current I_f="20 mA", Forward Voltage U_f="3.2 V", Manufacturer="Wuerth Elektronik", Nominal Power="78 mW", Operating Temperature="-40 - 85 °C", Supplier Part Number 1=710-150060BS84000, Component Type="LED Diode", ComponentLink1Description=Datasheet, ComponentLink1URL=https://www.mouser.de/datasheet/2/445/150060BS84000-1838909.pdf, Created from=MGremer, Created On="08.12.2020 10:19:38", Last Updated="03.03.2021 09:59:51", Light Intensity="560 mcd", Live Cycle Status=1, Manufacturer Part Number=150060BS84000, Mounting Type=SMD, PartID=1, Stock number="not stored", Supplier 1=Mouser, Supplier 2=Farnell, Supplier 3=Digi-Key, Supplier Part Number 2=3408611, Supplier Part Number 3=732-150060BS84000CT-ND, Type=Standard, Wavelength="470 nm"
D2: "LED RED 520~625NM 90~100MCD@20MA TOP VIEW 0603 ROHS", Color=red, Device Package=0603, Forward Current I_f="20 mA", Forward Voltage U_f="2.1 V", LCSC Part Number=C2286, Manufacturer="Hubei KENTO Elec", Nominal Power="42 mW", Operating Temperature="-40 - 85 °C", Component Type="LED Diode", ComponentLink1Description=Datasheet, ComponentLink1URL=https://datasheet.lcsc.com/szlcsc/Hubei-KENTO-Elec-KT-0603R_C2286.pdf, Created from="T. Wendt", Created On="03.03.2021 10:06:23", Last Updated="04.03.2021 09:02:49", Light Intensity="110 mcd", Live Cycle Status=1, Manufacturer Part Number=KT-0603R, Mounting Type=SMD, PartID=8, Stock number="not stored", Supplier 1=LCSC, Supplier Part Number 1=C2286, Type=Standard, Wavelength="620 nm"
D3: "LED GREEN 520~535NM 112~258MCD@20MA TOP VIEW 0603 ROHS", Color=green, Device Package=0603, Forward Current I_f="20 mA", Forward Voltage U_f="3.3 V", LCSC Part Number=C72043, Manufacturer="Everlight Elec", Nominal Power="83 mW", Operating Temperature="-40 - 85 °C", Component Type="LED Diode", ComponentLink1Description=Datasheet, ComponentLink1URL=https://datasheet.lcsc.com/szlcsc/Everlight-Elec-19-217-GHC-YR1S2-3T_C72043.pdf, Created from="T. Wendt", Created On="03.03.2021 10:06:23", Last Updated="04.03.2021 09:02:49", Light Intensity="285 mcd", Live Cycle Status=1, Manufacturer Part Number=19-217/GHC-YR1S2/3T, Mounting Type=SMD, PartID=7, Stock number="not stored", Supplier 1=LCSC, Supplier 2=Mouser, Supplier Part Number 1=C72043, Supplier Part Number 2=638-19217GHCYR1S23T, Type=Standard, Wavelength="530 nm"
Date1: library part 5, "Create a project parameter named \"FinDate\" this is the value of this component. It is printed on the PCB. Once the parameter is updated (e.g. new revision) it gets updated on the PCB as well", Manufacturer="PCB Manufacturer", Manufacturer Part Number="Project End Date", Component Type="Date of Project Finalization", Created from="T. Wendt", Created On="01.03.2021 09:01:41", Last Updated="01.03.2021 09:01:41", Live Cycle Status=1, PartID=5, Type="Standard (No BOM)"
Designer: library part 4, "Create a project parameter named \"Author\" this is the value of this component. It is printed on the PCB. Once the parameter is updated (e.g. new revision) it gets updated on the PCB as well", Manufacturer="PCB Manufacturer", Manufacturer Part Number="Project Author", Component Type="Project Author", Created from="T. Wendt", Created On="01.03.2021 08:53:41", Last Updated="01.03.2021 09:20:27", Live Cycle Status=1, PartID=4, Type="Standard (No BOM)"
F1 F2 F3: "POLYSWITCH RESETTABLE DEVICES", Hold Current=1.1A, LCSC Part Number=C70119, Manufacturer=Littelfuse, MPN=miniASMDC110F/24, Nominal current="1 A", Operating Temperature="-40 - 85 °C", Package=1812, Resistance="0.18 Ohm", Supplier Part Number 1=530-0ZCG0150BF2C, Trip Current=2.2A, Voltage=24V, Component Type=Littelfuse_PTC_1812, ComponentLink1Description=Datasheet, ComponentLink1URL=https://www.littelfuse.com/~/media/electronics/datasheets/resettable_ptcs/littelfuse_ptc_surface_mount_catalog_datasheet.pdf.pdf, Created=2019_02_10_AGeiger, Created from=MHlatky, Created On="07.05.2021 06:50:33", Last Updated="27.05.2022 15:06:17", Live Cycle Status=1, Manufacturer Part Number=Littelfuse_PTC_1812, MF=Littelfuse, Mounting Type=SMD, PartID=5, Supplier 1=Mouser, Type=Fuse
IC1A IC1B IC1C IC2A IC2B IC2C: "Integrated Circuit", Manufacturer_Name="Texas Instruments", Mouser Part Number=595-THVD1450D, Arrow Part Number=THVD1450D, Arrow Price/Stock=https://www.arrow.com/en/products/thvd1450d/texas-instruments?region=europe, Datasheet Link=http://www.ti.com/lit/gpn/THVD1450, Height=1.75mm, Manufacturer_Part_Number=THVD1450D, Mouser Price/Stock=https://www.mouser.co.uk/ProductDetail/Texas-Instruments/THVD1450D?qs=chTDxNqvsylemUKR9F4kpw%3D%3D, Supplier 1=Mouser, Supplier Part Number 1=595-THVD1450D
J1A J1B J1C: "Connector; D Subminiature; 9 Position; Right Angle; Pitch 1.385 mm", Device Package=-, LCSC Part Number=C141882, Manufacturer="TE Connectivity", PackageDocument=O, Supplier Part Number 1=571-2311765-1, Component Type="DSUB Connector", ComponentLink1Description=Datasheet, ComponentLink1URL=https://www.mouser.de/datasheet/2/418/7/ENG_CD_2311765_D-2072985.pdf, Created from=MHlatky, Created On="26.01.2021 09:19:51", DatasheetDocument=1-Sep-1999, Gender=Receptacle, Last Updated="27.05.2022 15:54:50", LatestRevisionDate=17-Jul-2002, LatestRevisionNote="Re-released for DXP Platform.", Live Cycle Status=1, Manufacturer Part Number=DSUB1.385-2H9, Orientation="Right Angle", PackageReference=788750, PartID=5, Positions=9, Published=15-Jun-2001, Publisher="Altium Limited", Stock number="not stored", Supplier 1=Mouser, Type="DSUB Connector"
LOGO1: library part 1, "Official Project Logo of the UltraZohm", Manufacturer="PCB Manufacturer", Manufacturer Part Number="UltraZohm Logo", Component Type=Logo, ComponentLink1Description=Homepage, ComponentLink1URL=https://ultrazohm.com, Created from="T. Wendt", Created On="19.02.2021 16:55:56", Last Updated="02.03.2021 14:31:24", Live Cycle Status=1, PartID=1, Type="Standard (No BOM)"
MH1 MH2: library part "Mounting Hole - 1mm", "Non plated through hole, 1mm"
Project1: library part 2, "Create a project parameter named \"ProjectNameCustom\" this is the value of this component and it is printed on the PCB.", Manufacturer="PCB Manufacturer", Manufacturer Part Number="Project Name", Component Type="Project Name", Created from="T. Wendt", Created On="01.03.2021 08:43:57", Last Updated="01.03.2021 09:07:27", Live Cycle Status=1, PartID=2, Type="Standard (No BOM)"
R1 R2 R10A R10B R10C R11A R11B R11C R12A R12B R12C R13A R13B R13C R14A R14B R14C R17A R17B R17C R26A R26B R26C R27A R27B R27C R28A R28B R28C: library part RC0603JR-070RL, "SMD resistor E24 series", Device Package=0603, LCSC Part Number=C21189, Manufacturer=YAGEO, Supplier Part Number 1=603-RC0603JR-070RL, Tolerance=5%, Component Type="SMD resistor", ComponentLink1Description=Datasheet, ComponentLink1URL=https://www.mouser.de/datasheet/2/447/PYu-RC_Group_51_RoHS_L_10-1664068.pdf, Created from=MGremer, Created On="14.12.2020 16:17:14", Last Updated="04.03.2021 09:09:42", Live Cycle Status=1, Manufacturer Part Number=RC0603JR-070RL, Mounting Type=SMD, PartID=1, Stock number="Labor SMD Container", Supplier 1=Mouser, Supplier 2=LCSC, Supplier Part Number 2=C21189, Type=Resistor
R3A R3B R3C R4A R4B R4C R5A R5B R5C R6A R6B R6C R7A R7B R7C R9A R9B R9C R18A R18B R18C R19A R19B R19C R20A R20B R20C R21A R21B R21C: library part RC0603FR-071KL, "SMD resistor 1%", Device Package=0603, LCSC Part Number=C3016283, Manufacturer=YAGEO, Supplier Part Number 1=9238484, Tolerance=1%, Component Type="SMD resistor", ComponentLink1Description=Datasheet, ComponentLink1URL=http://www.farnell.com/datasheets/2860681.pdf, Created from=MGremer, Created On="14.12.2020 16:17:14", Last Updated="15.02.2023 17:36:12", Live Cycle Status=1, Manufacturer Part Number=RC0603FR-071KL, Mounting Type=SMD, PartID=177, Stock number="not stored", Supplier 1=Farnell, Type=Resistor
R8: library part CRCW060324K9FKEA, "SMD resistor 1%", Device Package=0603, Manufacturer=Vishay, Supplier Part Number 1=71-CRCW0603-24.9K-E3, Tolerance=1%, Component Type="SMD resistor", ComponentLink1Description=Datasheet, ComponentLink1URL=https://www.mouser.de/datasheet/2/427/dcrcwe3-1762152.pdf, Created from=MGremer, Created On="14.12.2020 16:17:14", Last Updated="02.03.2021 14:07:32", Live Cycle Status=1, Manufacturer Part Number=CRCW060324K9FKEA, Mounting Type=SMD, PartID=157, Stock number="not stored", Supplier 1=Mouser, Type=Resistor
R15A R15B R15C R16A R16B R16C R23A R23B R23C R24A R24B R24C: library part RK73B1JTTD103J, "SMD resistor E24 series", Device Package=0603, LCSC Part Number=C25804, Manufacturer="KOA Speer", Supplier Part Number 1=660-RK73B1JTTD103J, Tolerance=5%, Component Type="SMD resistor", ComponentLink1Description=Datasheet, ComponentLink1URL=https://www.mouser.de/datasheet/2/219/RK73B-1825463.pdf, Created from=MGremer, Created On="14.12.2020 16:17:14", Last Updated="27.05.2022 14:04:22", Live Cycle Status=1, Manufacturer Part Number=RK73B1JTTD103J, Mounting Type=SMD, PartID=98, Stock number="Labor SMD Container", Supplier 1=Mouser, Type=Resistor
R22A R22B R22C R25A R25B R25C: library part RK73B1JTTD121J, "SMD resistor E24 series", Device Package=0603, LCSC Part Number=C22787, Manufacturer="KOA Speer", Supplier Part Number 1=660-RK73B1JTTD121J, Tolerance=5%, Component Type="SMD resistor", ComponentLink1Description=Datasheet, ComponentLink1URL=https://www.mouser.de/datasheet/2/219/RK73B-1825463.pdf, Created from=MGremer, Created On="14.12.2020 16:17:14", Last Updated="27.05.2022 13:40:47", Live Cycle Status=1, Manufacturer Part Number=RK73B1JTTD121J, Mounting Type=SMD, PartID=52, Stock number="Labor SMD Container", Supplier 1=Mouser, Type=Resistor
R29: library part 0603WAF4701T5E, "SMD resistor E24 series", Device Package=0603, LCSC Part Number=C23162, Manufacturer=UNI-ROYAL, Tolerance=1%, Component Type="SMD resistor", ComponentLink1Description=Datasheet, ComponentLink1URL=https://datasheet.lcsc.com/lcsc/2206010116_UNI-ROYAL-Uniroyal-Elec-0603WAF4701T5E_C23162.pdf, Created from=AGeiger, Created On="14.12.2020 16:17:14", Last Updated="25.08.2022 20:03:04", Live Cycle Status=1, Manufacturer Part Number=0603WAF4701T5E, Mounting Type=SMD, PartID=90, Stock number="Labor SMD Container", Supplier 1=LCSC, Supplier Part Number 1=C23162, Type=Resistor
R30: library part RK73B1JTTD222J, "SMD resistor E24 series", Device Package=0603, LCSC Part Number=C4190, Manufacturer="KOA Speer", Supplier Part Number 1=660-RK73B1JTTD222J, Tolerance=5%, Component Type="SMD resistor", ComponentLink1Description=Datasheet, ComponentLink1URL=https://www.mouser.de/datasheet/2/219/RK73B-1825463.pdf, Created from=MGremer, Created On="14.12.2020 16:17:14", Last Updated="31.01.2023 21:49:41", Live Cycle Status=1, Manufacturer Part Number=RK73B1JTTD222J, Mounting Type=SMD, PartID=82, Stock number="Labor SMD Container", Supplier 1=Mouser, Type=Resistor
Revision: library part 3, "Create a project parameter named \"ProjectRevision\" this is the value of this component. It is printed on the PCB. Once the parameter is updated (e.g. new revision) it gets updated on the PCB as well", Manufacturer="PCB Manufacturer", Manufacturer Part Number="Project Revision", Component Type="Project Revision", Created from="T. Wendt", Created On="01.03.2021 08:50:34", Last Updated="01.03.2021 09:28:36", Live Cycle Status=1, PartID=3, Type="Standard (No BOM)"
Serial1: library part 6, "Field to put in a serial number", Manufacturer="PCB Manufacturer", Manufacturer Part Number="Serial Number", Component Type="Serial Number", Created from="T. Wendt", Created On="02.03.2021 14:31:24", Last Updated="02.03.2021 14:31:24", Live Cycle Status=1, PartID=6, Type="Standard (No BOM)"
U2A U2B U2C: library part CMP-2000-07337-1, "TXB0108 8-Bit Bidirectional Voltage-Level Translator with Auto-Direction Sensing and / +/- 15-kV ESD Protection, 1.2 to 3.6 V, -40 to 85 degC, 20-Pin TSSOP (PW), Green (RoHS & no Sb/Br), Tape and Reel", Manufacturer="Texas Instruments", Operating Temperature=-40°C~85°C, Package / Case="20-TSSOP(0.173\",4.40mmWidth)", Package Description="20-Pin Small Outline Package Integrated Circuit, Body 6.5 x 4.4 mm, Pitch 0.65 mm", Package Reference=PW20, Package Version="4040064-5/G, 02/2011", Standard Package=1, Supplier Device Package=20-TSSOP, Voltage - Supply=1.2V~3.6V,1.65V~5.5V, Category=IntegratedCircuits(ICs), Data Rate=100Mbps, Datasheet URL=http://www.ti.com/general/docs/lit/getliterature.tsp?genericPartNumber=TXB0108&fileType=pdf, Datasheet Version="Rev. F, 12/2014", Differential - Input=Output:No/No, Dynamic Catalog=TXBSeries, Family=Logic-Translators, Input Type=Logic, Logic Function=Translator,Bidirectional, Manufacturer URL=http://www.ti.com/, Mounting Technology=SurfaceMount, Number of Bits=8, Number of Channels=8, Number of Outputs/Channel=1, Other Names=296-21527-6, Output Type=Logic, Package URL=http://www.ti.com/litv/pdf/mpds362, Packaging=Digi-Reel®, Product Training Modules=VoltageLevelTranslation, Propagation Delay (Max)=4ns, Series=-
X1: "Mating Card Layout for HSEC8-150-01-XX-DV-A-BL", Manufacturer=SAMTEC, Created=2018_04_23_AGeiger
X2A X2B X2C: library part 103741-8, "8 Pin", Manufacturer="TE Connectivity", Supplier Part Number 1=571-103741-8, Component Type="Pin Header", ComponentLink1Description=Datasheet, ComponentLink1URL=https://www.mouser.de/datasheet/2/427/VISH_S_A0003529023_1-2568887.pdf, Created from=MHlatky, Created On="22.11.2021 15:31:45", Last Updated="21.03.2022 12:19:22", Live Cycle Status=1, Manufacturer Part Number=103741-8, PartID=9, Stock number="not stored", Supplier 1=Mouser, Type="Pin Header"

## Via types
v1: diameter 0.6, hole 0.3, Top Layer to Bottom Layer, tented both sides, 92 vias

## Nets (pads, with @x,y where several pads share a name; then routed paths per layer and width w, separated by ;. In a path a pad name is that pad's centre, name@x,y a point inside that pad or via, vN(x,y) a via of type N, cw(c..) or ccw(c..) an arc to the next point about the centre after c; other vN are vias at no path point)
3V3_PER: F3.1 X1.13 X1.14 | length 35.9
  Top Layer w0.5: X1.13@-12.44,66.391 15.391,66.391 18.5,69.5 18.5,73.01 F3.1@18.4,73.11
3V3_PER_fused: BS2A.2 BS2B.2 BS2C.2 F3.2 R30.2 | length 115.9
  Top Layer w0.5: R30.2@17.65,80 17.65,78.48 18.24,77.89 F3.2@18.4,77.89 18.51,78 v1(21,78) ; v1(52.703,22.525) 52.73,22.525 52.757,22.497 BS2C.2@54.403,22.497 ; v1(52.803,53.425) 52.83,53.425 52.857,53.397 BS2B.2@54.503,53.397 ; v1(52.903,85.625) 52.93,85.625 52.957,85.597 BS2A.2@54.603,85.597
  VCC w0.5: v1(21,78) 21,83.8 22.825,85.625 v1(52.903,85.625) 51,83.722 51,55.228 ; v1(52.703,22.525) 51,24.228 51,55.228 ; v1(52.803,53.425) 51,55.228
5V_PER: F2.1 X1.9 X1.10 | length 28.6
  Top Layer w0.5: X1.9@-12.44,67.991 10.391,67.991 12,69.6 F2.1@12,73.11
5V_PER_fused: BS1A.2 BS1B.2 BS1C.2 F2.2 R29.2 | length 127.3
  Top Layer w0.5: R29.2@11.35,80 11.35,78.48 11.94,77.89 F2.2@12,77.89 12.11,78 v1(14.5,78) ; v1(52.776,26.525) BS1C.2@54.376,26.525 ; v1(52.876,57.425) BS1B.2@54.476,57.425 ; v1(52.976,89.625) BS1A.2@54.576,89.625
  VCC w0.5: v1(14.5,78) 14.5,85.9 18.225,89.625 v1(52.976,89.625) 55.8,86.801 55.8,60.349 ; v1(52.776,26.525) 55.8,29.549 55.8,60.349 ; v1(52.876,57.425) 55.8,60.349
75_DE1A: IC1A.3 R12A.2 | length 5.9
  Top Layer w0.254: R12A.2@84.453,84.325 87.403,84.325 88.203,85.125 89.825,85.125 89.86,85.09 IC1A.3@89.991,85.09 ; IC1A.3@89.956,85.125 IC1A.3@89.973,85.125
75_DE1B: IC1B.3 R12B.2 | length 5.7
  Top Layer w0.254: R12B.2@84.441,52.166 87.391,52.166 88.191,52.966 IC1B.3@89.813,52.966